# Altium PCB 前端三极管驱动.PcbDoc
Units mil, origin at the board's own origin, x right, y up, seen from the top; angles counter-clockwise.
Board outline 3937.01 x 3937.01 mil, 2 copper layers (Top Layer, Bottom Layer); 149 components, 119 nets, 458 pads, 84 vias.
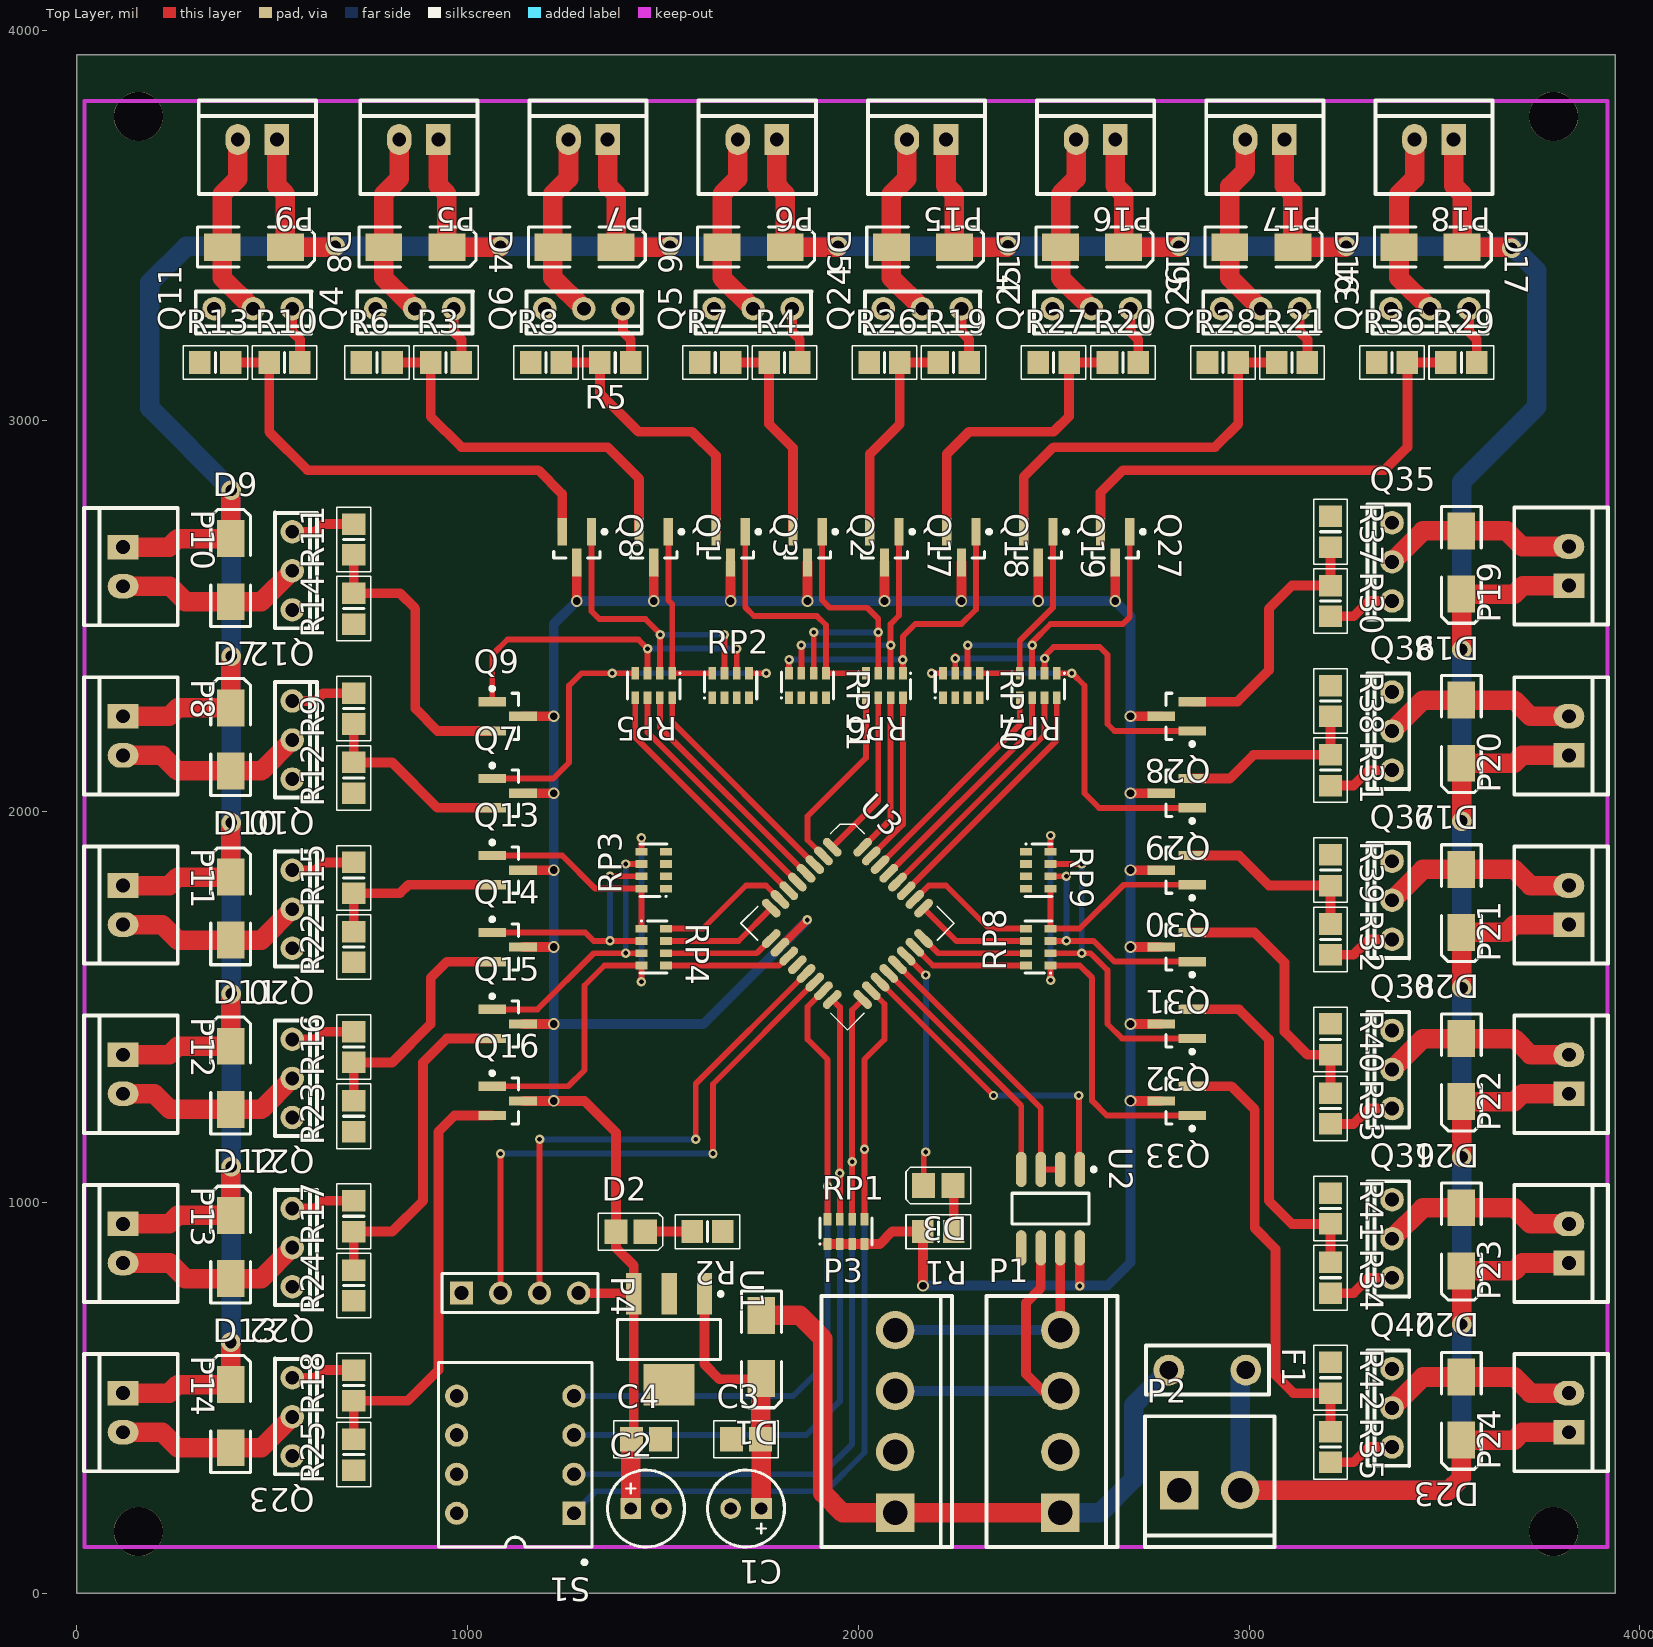
[diagram p0: Top Layer view]
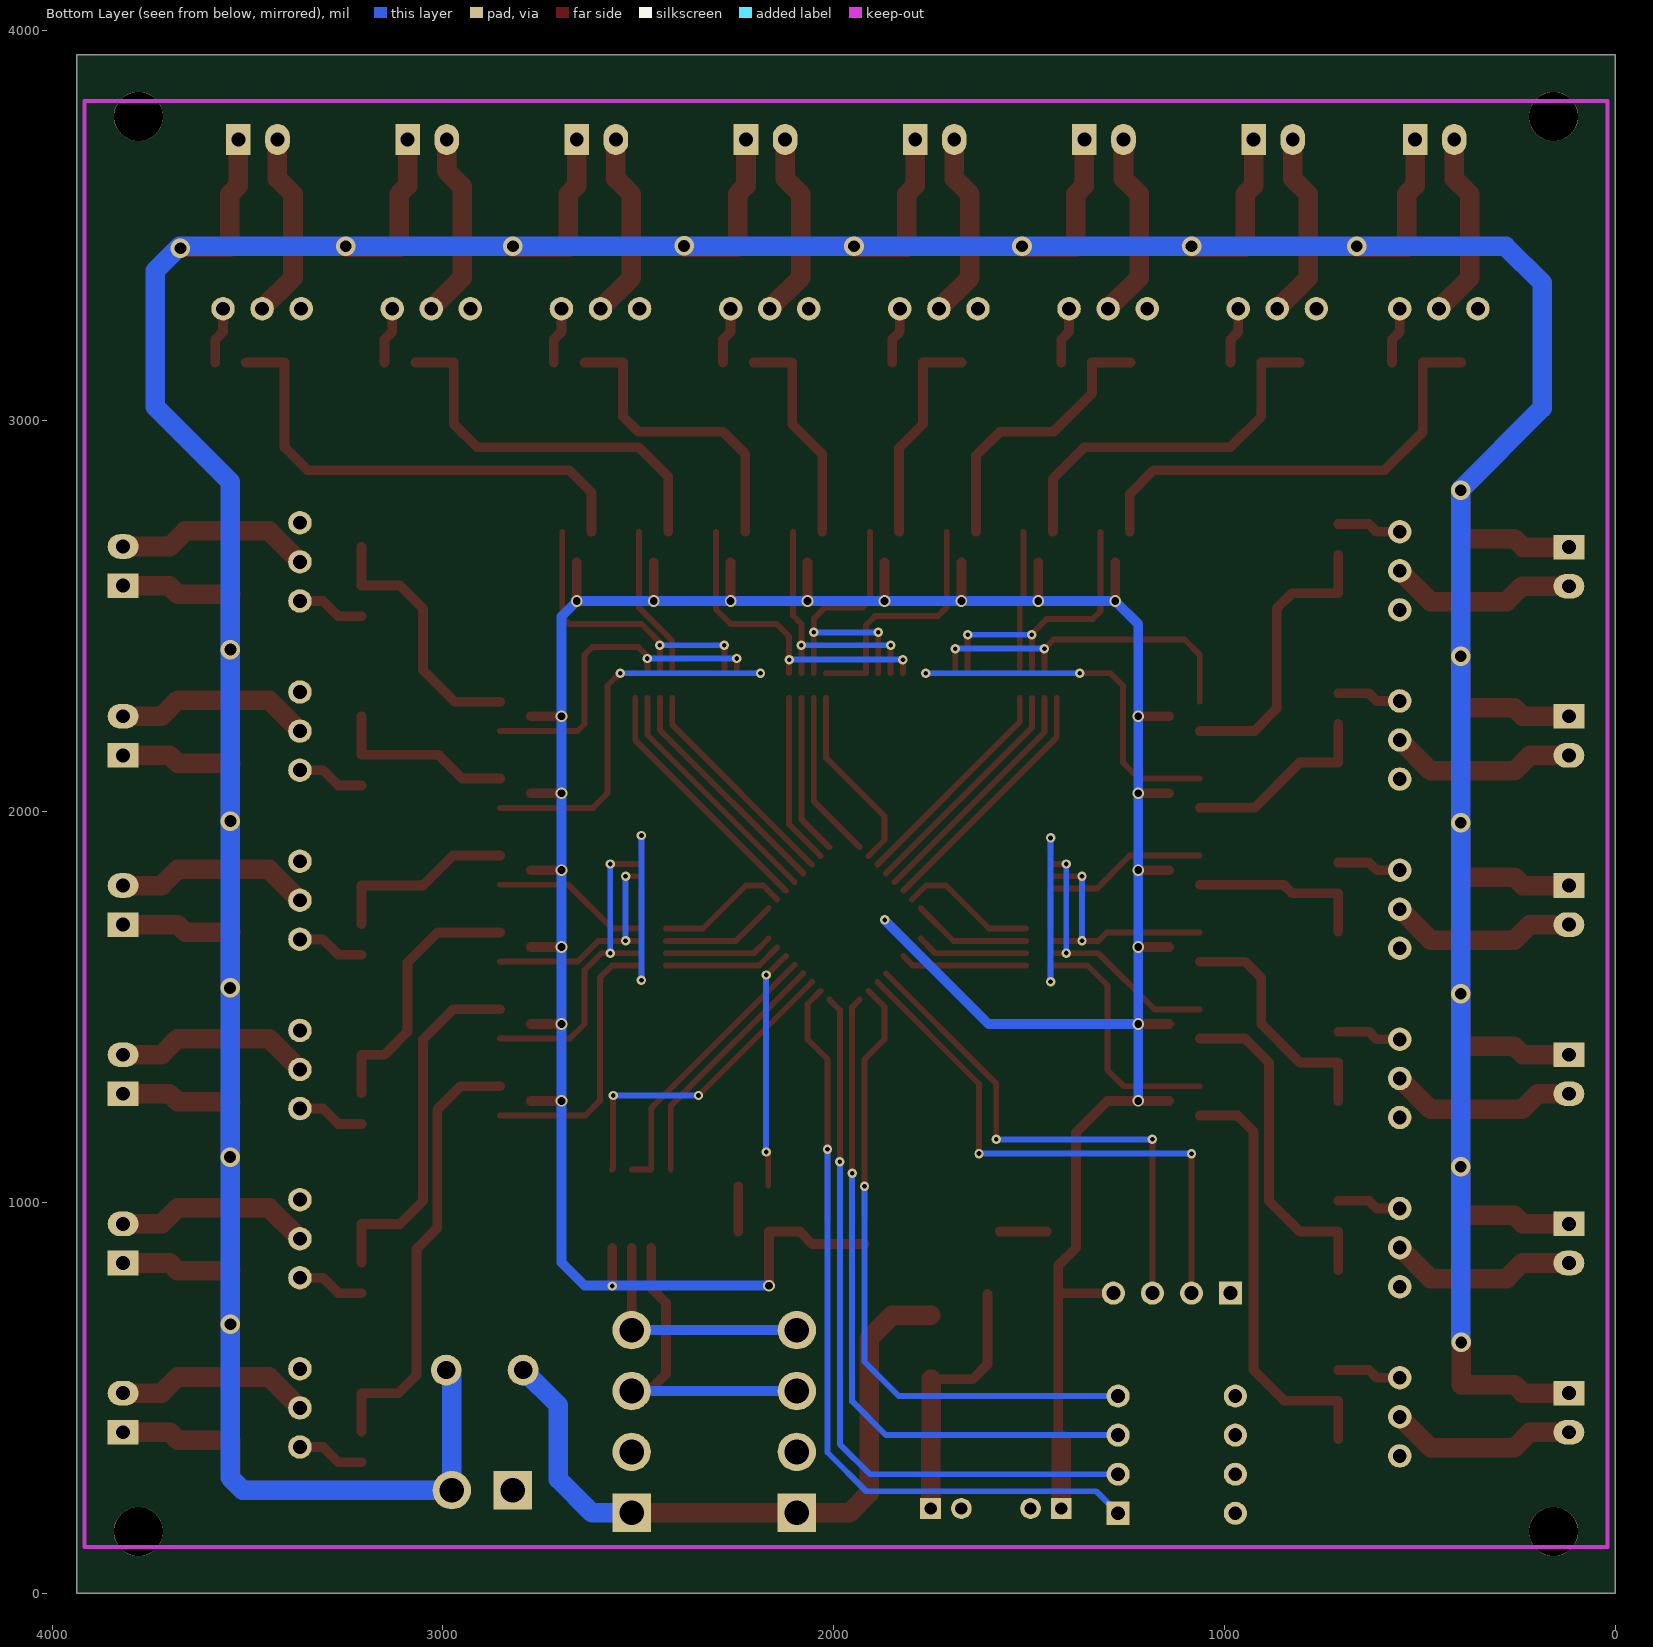
[diagram p1: Bottom Layer view, seen from below]

## Layer stack, top to bottom
Top Solder: solder mask 0.4, Solder Resist, Dk 3.5
Top Layer: signal copper 1.4
Dielectric 1: dielectric 12.6, FR-4, Dk 4.8
Bottom Layer: signal copper 1.4
Bottom Solder: solder mask 0.4, Solder Resist, Dk 3.5

## Board outline
0,0 3937.01,0 3937.01,3937.01 0,3937.01

## Design rules (kind name [scope] priority, off if disabled: settings)
Clearance [All] p1: gap=10
PolygonConnect [All] p1: connectstyle=Relief reliefconductorwidth=10 reliefentries=4 polygonreliefangle="90 Angle" airgapwidth=10
RoutingVias [All] p1: holewidth=28 width=50 viastyle="Through Hole" minholewidth=28 minwidth=50 maxholewidth=28 maxwidth=50
SolderMaskExpansion [All] p1: expansion=4
Width [All] p1: maxlimit=50 minlimit=10 preferedwidth=10
29 further rules are at their usual default settings.

## Components (designator, comment, footprint, x,y, rotation, side; value= is the part's Value field where it differs from the comment)
C1 "Cap Pol2" CAPPR2-5x11.5 1712.6,216.54 r180 top
C2 "Cap Pol2" CAPPR2-5x11.5 1456.69,216.54 r0 top
C3 "0.1uF" CAPC2012M 1712.6,393.7 r0 top
C4 "0.1uF" CAPC2012M 1456.69,393.7 r0 top
D1 "1N4007" DSO-C2/X1.8 1751.97,629.92 r270 top
D2 "LED" LED2012M 1417.32,925.2 r0 top
D3 "LED" LED2012M 2204.72,1043.31 r180 top
D4 "1N4007" DSO-C2/X1.8 866.14,3444.88 r0 top
D5 "1N4007" DSO-C2/X1.8 1732.28,3444.88 r0 top
D6 "1N4007" DSO-C2/X1.8 1299.21,3444.88 r0 top
D7 "1N4007" DSO-C2/X1.8 393.7,2185.04 r90 top
D8 "1N4007" DSO-C2/X1.8 452.76,3444.88 r0 top
D9 "1N4007" DSO-C2/X1.8 393.7,2618.11 r90 top
D10 "1N4007" DSO-C2/X1.8 393.7,1751.97 r90 top
D11 "1N4007" DSO-C2/X1.8 393.7,1318.9 r90 top
D12 "1N4007" DSO-C2/X1.8 393.7,885.83 r90 top
D13 "1N4007" DSO-C2/X1.8 393.7,452.76 r90 top
D14 "1N4007" DSO-C2/X1.8 2165.35,3444.88 r0 top
D15 "1N4007" DSO-C2/X1.8 2598.43,3444.88 r0 top
D16 "1N4007" DSO-C2/X1.8 3031.5,3444.88 r0 top
D17 "1N4007" DSO-C2/X1.8 3464.57,3444.88 r0 top
D18 "1N4007" DSO-C2/X1.8 3543.31,2637.8 r270 top
D19 "1N4007" DSO-C2/X1.8 3543.31,2204.72 r270 top
D20 "1N4007" DSO-C2/X1.8 3543.31,1771.65 r270 top
D21 "1N4007" DSO-C2/X1.8 3543.31,1338.58 r270 top
D22 "1N4007" DSO-C2/X1.8 3543.31,905.51 r270 top
D23 "1N4007" DSO-C2/X1.8 3543.31,472.44 r270 top
F1 "Fuse" SR075 2795,571 r0 top
P1 "Header 4" VH396-4 2663,118 r90 top
P2 "Header 2" VH396-2 2734,118 r0 top
P3 "Header 4" VH396-4 2240,118 r90 top
P4 "Header 4" HDR1X4 984.25,767.72 r0 top
P5 "Header 2" XH254-2 925.2,3720.47 r180 top
P6 "Header 2" XH254-2 1791.34,3720.47 r180 top
P7 "Header 2" XH254-2 1358.27,3720.47 r180 top
P8 "Header 2" XH254-2 118.11,2244.09 r270 top
P9 "Header 2" XH254-2 511.81,3720.47 r180 top
P10 "Header 2" XH254-2 118.11,2677.17 r270 top
P11 "Header 2" XH254-2 118.11,1811.02 r270 top
P12 "Header 2" XH254-2 118.11,1377.95 r270 top
P13 "Header 2" XH254-2 118.11,944.88 r270 top
P14 "Header 2" XH254-2 118.11,511.81 r270 top
P15 "Header 2" XH254-2 2224.41,3720.47 r180 top
P16 "Header 2" XH254-2 2657.48,3720.47 r180 top
P17 "Header 2" XH254-2 3090.55,3720.47 r180 top
P18 "Header 2" XH254-2 3523.62,3720.47 r180 top
P19 "Header 2" XH254-2 3818.9,2578.74 r90 top
P20 "Header 2" XH254-2 3818.9,2144.09 r90 top
P21 "Header 2" XH254-2 3818.9,1711.02 r90 top
P22 "Header 2" XH254-2 3818.9,1277.95 r90 top
P23 "Header 2" XH254-2 3818.9,844.88 r90 top
P24 "Header 2" XH254-2 3818.9,411.81 r90 top
Q1 "NPN" SOT23-3M 1476.38,2677.17 r270 top
Q2 "NPN" SOT23-3M 1870.08,2677.17 r270 top
Q3 "NPN" SOT23-3M 1673.23,2677.17 r270 top
Q4 "NPN" SOT_32 964.57,3287.4 r180 top
Q5 "NPN" SOT_32 1830.71,3287.4 r180 top
Q6 "NPN" SOT_32 1397.64,3287.4 r180 top
Q7 "NPN" SOT23-3M 1102.36,2047.24 r0 top
Q8 "NPN" SOT23-3M 1279.53,2677.17 r270 top
Q9 "NPN" SOT23-3M 1102.36,2244.09 r0 top
Q10 "NPN" SOT_32 551.18,2283.46 r270 top
Q11 "NPN" SOT_32 551.18,3287.4 r180 top
Q12 "NPN" SOT_32 551.18,2716.54 r270 top
Q13 "NPN" SOT23-3M 1102.36,1850.39 r0 top
Q14 "NPN" SOT23-3M 1102.36,1653.54 r0 top
Q15 "NPN" SOT23-3M 1102.36,1456.69 r0 top
Q16 "NPN" SOT23-3M 1102.36,1259.84 r0 top
Q17 "NPN" SOT23-3M 2066.93,2677.17 r270 top
Q18 "NPN" SOT23-3M 2263.78,2677.17 r270 top
Q19 "NPN" SOT23-3M 2460.63,2677.17 r270 top
Q20 "NPN" SOT_32 551.18,1850.39 r270 top
Q21 "NPN" SOT_32 551.18,1417.32 r270 top
Q22 "NPN" SOT_32 551.18,984.25 r270 top
Q23 "NPN" SOT_32 551.18,551.18 r270 top
Q24 "NPN" SOT_32 2263.78,3287.4 r180 top
Q25 "NPN" SOT_32 2696.85,3287.4 r180 top
Q26 "NPN" SOT_32 3129.92,3287.4 r180 top
Q27 "NPN" SOT23-3M 2657.48,2677.17 r270 top
Q28 "NPN" SOT23-3M 2814.96,2244.09 r180 top
Q29 "NPN" SOT23-3M 2814.96,2047.24 r180 top
Q30 "NPN" SOT23-3M 2814.96,1850.39 r180 top
Q31 "NPN" SOT23-3M 2814.96,1653.54 r180 top
Q32 "NPN" SOT23-3M 2814.96,1456.69 r180 top
Q33 "NPN" SOT23-3M 2814.96,1259.84 r180 top
Q34 "NPN" SOT_32 3562.99,3287.4 r180 top
Q35 "NPN" SOT_32 3366.14,2539.37 r90 top
Q36 "NPN" SOT_32 3366.14,2106.3 r90 top
Q37 "NPN" SOT_32 3366.14,1673.23 r90 top
Q38 "NPN" SOT_32 3366.14,1240.16 r90 top
Q39 "NPN" SOT_32 3366.14,807.09 r90 top
Q40 "NPN" SOT_32 3366.14,374.02 r90 top
R1 "1K" RESC2012M 2204.72,925.2 r180 top
R2 "1K" RESC2012M 1614.17,925.2 r180 top
R3 "1K" RESC2012M 944.88,3149.61 r0 top
R4 "1K" RESC2012M 1811.02,3149.61 r0 top
R5 "1K" RESC2012M 1377.95,3149.61 r0 top
R6 "10K" RESC2012M 767.72,3149.61 r0 top
R7 "10K" RESC2012M 1633.86,3149.61 r0 top
R8 "10K" RESC2012M 1200.79,3149.61 r0 top
R9 "1K" RESC2012M 708.66,2263.78 r90 top
R10 "1K" RESC2012M 531.5,3149.61 r0 top
R11 "1K" RESC2012M 708.66,2696.85 r90 top
R12 "10K" RESC2012M 708.66,2086.61 r90 top
R13 "10K" RESC2012M 354.33,3149.61 r0 top
R14 "10K" RESC2012M 708.66,2519.68 r90 top
R15 "1K" RESC2012M 708.66,1830.71 r90 top
R16 "1K" RESC2012M 708.66,1397.64 r90 top
R17 "1K" RESC2012M 708.66,964.57 r90 top
R18 "1K" RESC2012M 708.66,531.5 r90 top
R19 "1K" RESC2012M 2244.09,3149.61 r0 top
R20 "1K" RESC2012M 2677.17,3149.61 r0 top
R21 "1K" RESC2012M 3110.24,3149.61 r0 top
R22 "10K" RESC2012M 708.66,1653.54 r90 top
R23 "10K" RESC2012M 708.66,1220.47 r90 top
R24 "10K" RESC2012M 708.66,787.4 r90 top
R25 "10K" RESC2012M 708.66,354.33 r90 top
R26 "10K" RESC2012M 2066.93,3149.61 r0 top
R27 "10K" RESC2012M 2500,3149.61 r0 top
R28 "10K" RESC2012M 2933.07,3149.61 r0 top
R29 "1K" RESC2012M 3543.31,3149.61 r0 top
R30 "1K" RESC2012M 3208.66,2539.37 r270 top
R31 "1K" RESC2012M 3208.66,2106.3 r270 top
R32 "1K" RESC2012M 3208.66,1673.23 r270 top
R33 "1K" RESC2012M 3208.66,1240.16 r270 top
R34 "1K" RESC2012M 3208.66,807.09 r270 top
R35 "1K" RESC2012M 3208.66,374.02 r270 top
R36 "10K" RESC2012M 3366.14,3149.61 r0 top
R37 "10K" RESC2012M 3208.66,2716.54 r270 top
R38 "10K" RESC2012M 3208.66,2283.46 r270 top
R39 "10K" RESC2012M 3208.66,1850.39 r270 top
R40 "10K" RESC2012M 3208.66,1417.32 r270 top
R41 "10K" RESC2012M 3208.66,984.25 r270 top
R42 "10K" RESC2012M 3208.66,551.18 r270 top
RP1 "10K" EXB38V 1968.5,925.2 r0 top
RP2 "10K" EXB38V 1673.23,2322.83 r0 top
RP3 "10K" EXB38V 1476.38,1850.39 r90 top
RP4 "470" EXB38V 1476.38,1653.54 r270 top
RP5 "470" EXB38V 1476.38,2322.83 r180 top
RP6 "470" EXB38V 2066.93,2322.83 r180 top
RP7 "470" EXB38V 2460.63,2322.83 r180 top
RP8 "470" EXB38V 2460.63,1653.54 r90 top
RP9 "10K" EXB38V 2460.63,1850.39 r270 top
RP10 "10K" EXB38V 2263.78,2322.83 r0 top
RP11 "10K" EXB38V 1870.08,2322.83 r0 top
S1 "SW DIP-4" SWITCH-8 1122.05,354.33 r180 top
U1 "LM7805" SOT223-4M 1515.75,649.61 r270 top
U2 "MAX485ESA" SO8_M 2492,984 r270 top
U3 "STC15W408S_LQFP32" LQFP32 1968.5,1732.28 r315 top

## Footprints (in the part's own frame and the unit in brackets; to place one, negate y for a bottom-side part, rotate by r counter-clockwise, add the part's x,y. Pads: shape width x height; smd on the part's side, far side on the other; paste and mask are expansions set on the pad)
CAPC2012M [mm] "Chip Capacitor, Body 2.0x1.3mm, IPC Low Density"
  rect 1.5x1.6 smd: 1(-0.95,0) 2(0.95,0)
  silkscreen extent -2.1,-1.2 2.1,1.2, body extent -1.1,-0.72 1.1,0.72, height 1.1
CAPPR2-5x11.5 [mm] "Capacitor, Electrolytic, Radial; Body 5 x 11.5 mm (Dia.xH typ); Pin Spacing 2 mm (typ)"
  rect 1.35x1.35 hole 0.8: 1(-1,0)
  round 1.35 hole 0.8: 2(1,0)
  silkscreen extent -2.5,-2.5 2.5,2.5
DSO-C2/X1.8 [mm] "DO-214-AC/SMA; 2 C-Bend Leads; Body 5 x 2.7 mm, inc. leads (LxW)"
  rect 2.4x1.8 smd: 1(-2.05,0) 2(2.05,0)
  silkscreen extent -3.65,-1.3 3.95,1.3
EXB38V [mm] "Chip Resistor Array, (0603x4); SM; 8 Leads; Body 3.40 x 1.75 mm (LxW max)"
  rect 0.5x0.8 smd: 1(-1.2,-0.8) 2(-0.4,-0.8) 3(0.4,-0.8) 4(1.2,-0.8) 5(1.2,0.8) 6(0.4,0.8) 7(-0.4,0.8) 8(-1.2,0.8)
  silkscreen extent -1.75,-0.87 1.7,0.87
HDR1X4 [mm] "Connector; Header; 4 Position"
  rect 1.5x1.5 hole 0.9: 1(0,0)
  round 1.5 hole 0.9: 2(2.54,0) 3(5.08,0) 4(7.62,0)
  silkscreen extent -1.27,-1.27 8.89,1.27
LED2012M [mm] "Chip LED, Body 2.0x1.3mm, IPC Low Density"
  rect 1.5x1.6 smd: 1(-0.95,0) 2(0.95,0)
  silkscreen extent -2.1,-1.2 2.1,1.2, body extent -1.1,-0.72 1.1,0.72, height 1.1
LQFP32 [mm]
  oval 1.5x0.55 smd: 1(-3.81,2.54) 2(-3.81,1.74) 3(-3.81,0.94) 4(-3.81,0.14) 5(-3.81,-0.66) 6(-3.81,-1.46) 7(-3.81,-2.26) 8(-3.81,-3.06) 17(4.59,-3.06) 18(4.59,-2.26) 19(4.59,-1.46) 20(4.59,-0.66) 21(4.59,0.14) 22(4.59,0.94) 23(4.59,1.74) 24(4.59,2.54)
  oval 0.55x1.5 smd: 9(-2.41,-4.46) 10(-1.61,-4.46) 11(-0.81,-4.46) 12(-0.01,-4.46) 13(0.79,-4.46) 14(1.59,-4.46) 15(2.39,-4.46) 16(3.19,-4.46) 25(3.19,3.94) 26(2.39,3.94) 27(1.59,3.94) 28(0.79,3.94) 29(-0.01,3.94) 30(-0.81,3.94) 31(-1.61,3.94) 32(-2.41,3.94)
  silkscreen extent -4.51,-5.16 5.29,4.64
RESC2012M [mm] "Chip Resistor, Body 2.0x1.3mm, IPC Low Density"
  rect 1.4x1.5 smd: 1(-1,0) 2(1,0)
  silkscreen extent -2.1,-1.1 2.1,1.1, body extent -1.07,-0.7 1.07,0.7, height 0.65
SO8_M [mm] "SOIC, 8-Leads, Body 4.9x3.9mm, Pitch 1.27mm, IPC Low Density"
  oval 2.3x0.7 smd: 1(-2.55,1.905) 2(-2.55,0.635) 3(-2.55,-0.635) 4(-2.55,-1.905) 5(2.55,-1.905) 6(2.55,-0.635) 7(2.55,0.635) 8(2.55,1.905)
  silkscreen extent -2.67,-2.5 1,2.93, body extent -2,-2.5 2,2.5, height 1.75
SOT23-3M [mm] "SOT23, 3-Leads, Body 2.9x1.3mm, Pitch 0.95mm, Lead Span 2.5mm, IPC Low Density"
  rect 1.8x0.6 smd: 1(-1,0.95) 2(-1,-0.95) 3(1,0)
  silkscreen extent -1.12,-1.5 0.7,1.93, body extent -0.7,-1.5 0.7,1.5, height 1.1
SOT223-4M [mm] "SOT223/SC73, 4-Leads, Body 6.5x3.5mm, Pitch 2.3mm, Lead Span 7mm, IPC Low Density"
  rect 2.7x1 smd: 1(-2.95,2.3) 2(-2.95,0) 3(-2.95,-2.3)
  rect 2.7x3.3 smd: 4(2.95,0)
  silkscreen extent -3.07,-3.35 1.3,3.48, body extent -1.85,-3.35 1.85,3.35, height 1.8
SOT_32 [mil]
  round 60 hole 35.43: 1(0,0) 2(200,0) 3(100,0)
  silkscreen extent -49,-44 247,63
SR075 [mm]
  round 2 hole 1.2: 1(0,0) 2(5,0)
  silkscreen extent -1.5,-1.6 6.5,1.6
SWITCH-8 [mm] "DIP; 8 Leads; Row Spacing 7.62 mm; Pitch 2.54 mm"
  rect 1.5x1.5 hole 0.9: 1(-3.81,3.81)
  round 1.5 hole 0.9: 2(-3.81,1.27) 3(-3.81,-1.27) 4(-3.81,-3.81) 5(3.81,-3.81) 6(3.81,-1.27) 7(3.81,1.27) 8(3.81,3.81)
  silkscreen extent -5,-6 5,7.12, body extent -5,-6 5,6, height 6.2
VH396-2 [mm]
  rect 2.5x2.5 hole 1.6: 1(2.22,3.7)
  round 2.5 hole 1.6: 2(6.18,3.7)
  silkscreen extent 0,0 8.4,8.5
VH396-4 [mm]
  rect 2.5x2.5 hole 1.6: 1(2.22,3.7)
  round 2.5 hole 1.6: 2(6.18,3.7) 3(10.14,3.7) 4(14.1,3.7)
  silkscreen extent 0,0 16.32,8.5
XH254-2 [mm]
  rect 1.6x2 hole 0.9: 1(0,0)
  oval 1.6x2 hole 0.9: 2(2.54,0)
  silkscreen extent -2.54,-2.54 5.08,3.56

## Part data
C1 C2: "Polarized Capacitor (22uf-47uf)"
C3 C4: library part Cap, "Capacitor"
D1 D4 D5 D6 D7 D8 D9 D10 D11 D12 D13 D14 D15 D16 D17 D18 D19 D20 D21 D22 D23: library part Diode, "Default Diode"
D2 D3: "Typical INFRARED GaAs LED"
P1 P3 P4: "Header, 4-Pin"
P2 P5 P6 P7 P8 P9 P10 P11 P12 P13 P14 P15 P16 P17 P18 P19 P20 P21 P22 P23 P24: "Header, 2-Pin"
Q1 Q2 Q3 Q4 Q5 Q6 Q7 Q8 Q9 Q10 Q11 Q12 Q13 Q14 Q15 Q16 Q17 Q18 Q19 Q20 Q21 Q22 Q23 Q24 Q25 Q26 Q27 Q28 Q29 Q30 Q31 Q32 Q33 Q34 Q35 Q36 Q37 Q38 Q39 Q40: "NPN Bipolar Transistor"
R1 R2 R3 R4 R5 R6 R7 R8 R9 R10 R11 R12 R13 R14 R15 R16 R17 R18 R19 R20 R21 R22 R23 R24 R25 R26 R27 R28 R29 R30 R31 R32 R33 R34 R35 R36 R37 R38 R39 R40 R41 R42: library part Res, "Resistor"
RP1 RP2 RP3 RP4 RP5 RP6 RP7 RP8 RP9 RP10 RP11: library part "Res Pack"
S1: "DIP Switch, 4 Position, SPST"
U2: "Low-Power, Slew-Rate-Limited RS-485/RS-422 Transceiver"

## Free pads (board coordinates)
  round 125.98 hole 125.98: 0(157.48,157.48) 0(157.48,3779.53) 0(3779.53,157.48) 0(3779.53,3779.53)

## Via types
v1: diameter 24, hole 12, Top Layer to Bottom Layer, 44 vias
v2: diameter 30, hole 20, Top Layer to Bottom Layer, 21 vias
v3: diameter 50, hole 30, Top Layer to Bottom Layer, 19 vias

## Nets (pads, with @x,y where several pads share a name; then routed paths per layer and width w, separated by ;. In a path a pad name is that pad's centre, name@x,y a point inside that pad or via, vN(x,y) a via of type N, cw(c..) or ccw(c..) an arc to the next point about the centre after c; other vN are vias at no path point)
24V: D1.1 F1.1 P1.1 P3.1 | length 1880.7
  Top Layer w50: D1.1 1850.37,710.63 1909.45,651.55 1909.45,255.91 1959.84,205.51 ; P3.1@2094.33,205.51 1959.84,205.51 ; P1.1 P3.1 1959.95,205.4 1959.84,205.51
  Bottom Layer w50: P1.1 2618.4,205.4 2705,292 2705,481 F1.1
24V_OUT: D4.2 D5.2 D6.2 D7.2 D8.2 D9.2 D10.2 D11.2 D12.2 D13.2 D14.2 D15.2 D16.2 D17.2 D18.2 D19.2 D20.2 D21.2 D22.2 D23.2 F1.2 P2.2 P5.1 P6.1 P7.1 P8.1 P9.1 P10.1 P11.1 P12.1 P13.1 P14.1 P15.1 P16.1 P17.1 P18.1 P19.1 P20.1 P21.1 P22.1 P23.1 P24.1 | length 19360.4
  Top Layer w50: P14.1 236.22,511.81 257.87,533.46 D13.2 v3(393.7,641.7) ; P13.1 236.22,944.88 257.87,966.54 D12.2 v3@393.7,1089.7 ; P12.1 236.22,1377.95 257.87,1399.61 D11.2 v3@393.7,1532.7 ; P11.1 236.22,1811.02 257.87,1832.68 D10.2 v3@393.7,1970.7 ; P8.1 236.22,2244.09 257.87,2265.75 D7.2 v3@393.7,2396.7 ; P10.1 236.22,2677.17 257.87,2698.82 D9.2 v3@393.7,2821.7 ; P9.1 511.81,3602.36 533.46,3580.71 D8.2 v3@658.88,3444.88 ; P5.1 925.2,3602.36 946.85,3580.71 D4.2 v3@1081.88,3444.88 ; P7.1 1358.27,3602.36 1379.92,3580.71 D6.2 v3@1515.88,3444.88 ; P6.1 1791.34,3602.36 1812.99,3580.71 D5.2 v3@1945.88,3444.88 ; P15.1 2224.41,3602.36 2246.06,3580.71 D14.2 v3@2379.88,3444.88 ; P16.1 2657.48,3602.36 2679.13,3580.71 D15.2 v3@2818.88,3444.88 ; P2.2 3511.7,263.67 3543.31,295.28 D23.2 3679.13,391.73 3699.21,411.81 P24.1 ; P17.1 3090.55,3602.36 3112.2,3580.71 D16.2 v3@3246.88,3444.88 ; P18.1 3523.62,3602.36 3545.28,3580.71 D17.2 v3@3669.12,3444.88 ; D22.2 3679.13,824.8 3699.21,844.88 P23.1 ; D21.2 3679.13,1257.87 3699.21,1277.95 P22.1 ; D20.2 3659.45,1690.94 3679.53,1711.02 P21.1 ; D19.2 3679.13,2124.02 3699.21,2144.09 P20.1 ; D18.2 3679.13,2557.09 3700.79,2578.74 P19.1 ; v3(3544,688) D22.2@3544,824.11 ; v3(3544,1976) D19.2@3544,2123.32 ; v3(3544,2415) D18.2@3544,2556.39 ; v3(3545,1116) D21.2@3545,1256.18 ; v3(3545,1549) D20.2@3545,1689.25
  Bottom Layer w50: v3@395,642 v3(395,1091) v3(395,1534) v3(395,1972) v3(395,2398) v3(395,2823) 395,2825 187,3033 187,3354 280,3447 v3(661,3447) v3(1084,3447) v3(1518,3447) v3(1948,3447) v3(2821,3447) v3(3249,3447) 3674,3447 3736,3385 3736,3036 3545,2845 v3(3545,1549) v3(3545,1116) 3545,296 3512.67,263.67 P2.2 2977.31,556.46 F1.2
  other v3: 3672,3442 2383,3448
A: P1.3 P3.3 U2.6 | length 823
  Top Layer w25: U2.6 2467,781 2429,743 2429,560.76 P1.3@2472.44,517.32
  Bottom Layer w25: P3.3 P1.3
ADDR1: RP1.5 S1.1 U3.18 | length 2204.3
  Top Layer w15: RP1.5 v1(2015.75,1136) 2015.75,1366.14 2066.93,1417.32 2066.93,1508.03 U3.18
  Bottom Layer w15: S1.1 1328.33,260.61 1916.61,260.61 2015.75,359.75 v1(2015.75,1136)
ADDR2: RP1.6 S1.2 U3.17 | length 2040.6
  Top Layer w15: RP1.6 v1(1984.25,1104) 1984.25,1492.47 U3.17
  Bottom Layer w15: S1.2 1907.33,304.33 1984.25,381.25 v1(1984.25,1104)
ADDR3: RP1.7 S1.3 U3.16 | length 1871.5
  Top Layer w15: U3.16 1952.76,1499.71 v1(1952.76,1075) RP1.7
  Bottom Layer w15: S1.3 1866.33,404.33 1952.76,490.76 v1(1952.76,1075)
ADDR4: RP1.8 S1.4 U3.15 | length 1757.3
  Top Layer w15: U3.15 1870.08,1500.79 1870.08,1417.32 1921.26,1366.14 RP1.8
  Bottom Layer w15: S1.4 1833.33,504.33 1921,592 v1(1921,1041)
B: P1.4 P3.4 U2.7 | length 668.9
  Top Layer w25: U2.7 2517,673.45 P1.4
  Bottom Layer w25: P3.4@2059.06,673.23 P3.4@2094.33,673.23 ; P3.4 P1.4
GND: C1.2 C2.2 C3.1 C4.2 P1.2 P2.1 P3.2 P4.1 Q4.2 Q5.2 Q6.2 Q10.2 Q11.2 Q12.2 Q20.2 Q21.2 Q22.2 Q23.2 Q24.2 Q25.2 Q26.2 Q34.2 Q35.2 Q36.2 Q37.2 Q38.2 Q39.2 Q40.2 R2.1 R6.1 R7.1 R8.1 R12.1 R13.1 R14.1 R22.1 R23.1 R24.1 R25.1 R26.1 R27.1 R28.1 R36.1 R37.1 R38.1 R39.1 R40.1 R41.1 R42.1 RP2.1 RP2.2 RP2.3 RP2.4 RP3.1 RP3.2 RP3.3 RP3.4 RP9.1 RP9.2 RP9.3 RP9.4 RP10.1 RP10.2 RP10.3 RP10.4 RP11.1 RP11.2 RP11.3 RP11.4 S1.5 S1.6 S1.7 S1.8 U1.2 U1.4 U2.5 U3.12
LC1: RP6.6 U3.1 | length 431.2
  Top Layer w15: U3.1 2051.18,2027.09 RP6.6
LC2: RP6.5 U3.2 | length 483.4
  Top Layer w15: U3.2 1870.08,1927.59 1870.08,1988.19 2019.68,2137.8 RP6.5
LC3: RP5.8 U3.3 | length 578
  Top Layer w15: RP5.8 1523.62,2229.5 U3.3
LC4: RP5.7 U3.4 | length 604.1
  Top Layer w15: RP5.7 1492.13,2216.46 U3.4
LC5: RP5.6 U3.5 | length 630.2
  Top Layer w15: RP5.6 1460.63,2203.41 U3.5
LC6: RP5.5 U3.6 | length 656.3
  Top Layer w15: RP5.5 1429.13,2190.36 U3.6
LC7: RP4.8 U3.7 | length 352.1
  Top Layer w15: RP4.8 1602.36,1700.79 1712.6,1811.02 1763.93,1811.02 U3.7
LC8: RP4.7 U3.8 | length 304.1
  Top Layer w15: RP4.7 1693.38,1669.29 U3.8
LC9: RP4.6 U3.9 | length 284.9
  Top Layer w15: RP4.6 1739.83,1637.8 U3.9
LC10: RP4.5 U3.11 | length 324
  Top Layer w15: RP4.5 1797.42,1606.3 U3.11
LC11: RP6.7 U3.32 | length 411.9
  Top Layer w15: U3.32 2082.68,1980.64 RP6.7
LC12: RP6.8 U3.31 | length 438
  Top Layer w15: U3.31 2114.17,1967.59 RP6.8
LC13: RP7.5 U3.30 | length 575
  Top Layer w15: U3.30 2413.39,2222.26 RP7.5
LC14: RP7.6 U3.29 | length 601.1
  Top Layer w15: U3.29 2444.88,2209.22 RP7.6
LC15: RP7.7 U3.28 | length 627.2
  Top Layer w15: U3.28 2476.38,2196.17 RP7.7
LC16: RP7.8 U3.27 | length 653.3
  Top Layer w15: U3.27 2507.87,2183.13 RP7.8
LC17: RP8.5 U3.26 | length 344.8
  Top Layer w15: U3.26 2180.31,1811.02 2224.41,1811.02 2334.65,1700.79 RP8.5
LC18: RP8.6 U3.25 | length 296.9
  Top Layer w15: U3.25 2250.87,1669.29 RP8.6
LC19: RP8.7 U3.24 | length 277.6
  Top Layer w15: U3.24 2204.41,1637.8 RP8.7
LC20: RP8.8 U3.23 | length 303.7
  Top Layer w15: U3.23 2191.37,1606.3 RP8.8
LC_DRV1: Q2.1 RP6.3 RP11.6 | length 747.7
  Top Layer w15: RP11.6 1885.83,2458.83 v1(1886,2459) ; Q2.1 1907.48,2541.52 1927,2522 2023,2522 2051.18,2493.82 RP6.3
  Bottom Layer w15: v1(1886,2459) v1(2051,2459)
LC_DRV2: Q3.1 RP6.4 RP11.5 | length 644.5
  Top Layer w15: Q3.1 1710.63,2523.37 1733,2501 1894,2501 1917.32,2477.68 RP11.5 RP6.4
LC_DRV3: Q1.1 RP2.8 RP5.1 | length 468.6
  Top Layer w15: Q1.1 1513.78,2541.34 1523.62,2531.5 RP5.1 RP2.8
LC_DRV4: Q8.1 RP2.7 RP5.2 | length 766
  Top Layer w15: Q8.1 1316.93,2513.07 1337,2493 1455,2493 1492.13,2455.87 RP5.2 ; RP2.7 v1@1657.48,2452.48
  Bottom Layer w15: v1(1493,2453) v1(1657,2453)
LC_DRV5: Q9.1 RP2.6 RP5.3 | length 898
  Top Layer w15: Q9.1 1062.99,2401.57 1102.36,2440.94 1437.01,2440.94 v1(1460.63,2417.32) RP5.3 ; RP2.6@1689,2354.35 v1(1689,2417)
  Bottom Layer w15: v1(1460.63,2417.32) 1688.68,2417.32 v1(1689,2417)
LC_DRV6: Q7.1 RP2.5 RP5.4 | length 1031.4
  Top Layer w15: Q7.1 1218.5,2084.65 1259.84,2125.98 1259.84,2322.83 1291.34,2354.33 v1(1370,2354.33) RP5.4 ; RP2.5 v1(1764.33,2354.33)
  Bottom Layer w15: v1(1370,2354.33) v1(1764.33,2354.33)
LC_DRV7: Q13.1 RP3.8 RP4.1 | length 519.3
  Top Layer w15: Q13.1 1242.13,1887.8 1326.77,1803.15 RP3.8 RP4.1
LC_DRV8: Q14.1 RP3.7 RP4.2 | length 636.7
  Top Layer w15: Q14.1 1301.18,1690.94 1322.83,1669.29 RP4.2 ; v1(1364.35,1834.65) RP3.7
  Bottom Layer w15: v1(1364.35,1669.35) v1(1364.35,1834.65)
LC_DRV9: Q15.1 RP3.6 RP4.3 | length 709.4
  Top Layer w15: Q15.1 1179.13,1494.09 1322.83,1637.8 RP4.3 ; v1(1404.86,1866.14) RP3.6
  Bottom Layer w15: v1(1404.86,1638.14) v1(1404.86,1866.14)
LC_DRV10: Q16.1 RP3.5 RP4.4 | length 1080.9
  Top Layer w15: Q16.1 1257.87,1297.24 1299.21,1338.58 1299.21,1555.12 1350.39,1606.3 RP4.4 v1(1444.88,1565.12) ; RP3.5 v1(1444.88,1932.88)
  Bottom Layer w15: v1(1444.88,1565.12) v1(1444.88,1932.88)
LC_DRV11: Q17.1 RP6.2 RP11.7 | length 672
  Top Layer w15: v1(1854,2426) 1854.33,2425.67 RP11.7 ; RP6.2 2082.68,2480.31 2104.33,2501.97 Q17.1
  Bottom Layer w15: v1(1854,2426) v1(2083,2426)
LC_DRV12: Q18.1 RP6.1 RP11.8 | length 834.7
  Top Layer w15: RP11.8 v1(1822.83,2389.17) ; RP6.1 2114.17,2448.82 2145.67,2480.32 2263.78,2480.32 2301.18,2517.72 Q18.1
  Bottom Layer w15: v1(1822.83,2389.17) v1(2113.83,2389.17)
LC_DRV13: Q19.1 RP7.4 RP10.5 | length 499.6
  Top Layer w15: RP10.5 RP7.4 2413.39,2437.39 2498.03,2522.03 Q19.1
LC_DRV14: Q27.1 RP7.3 RP10.6 | length 810.6
  Top Layer w15: RP10.6 v1@2279.53,2425.53 ; RP7.3 2444.88,2433.53 2491.67,2480.32 2677.17,2480.32 2694.88,2498.03 Q27.1
  Bottom Layer w15: v1(2280,2426) v1(2445,2426)
LC_DRV15: Q28.1 RP7.2 RP10.7 | length 896.4
  Top Layer w15: RP10.7 v1@2248.03,2398.03 ; RP7.2 2476.38,2397.64 2500,2421.26 2618.11,2421.26 2637.8,2401.57 2637.8,2224.41 2655.51,2206.69 Q28.1
  Bottom Layer w15: v1(2248,2392) v1(2477,2392)
LC_DRV16: Q29.1 RP7.1 RP10.8 | length 1039.1
  Top Layer w15: v1(2187.33,2354.33) RP10.8 ; RP7.1 2547.24,2354.33 2578.74,2322.83 2578.74,2047.24 2616.14,2009.84 Q29.1
  Bottom Layer w15: v1(2187.33,2354.33) v1(2546.67,2354.33)
LC_DRV17: Q30.1 RP8.4 RP9.5 | length 511
  Top Layer w15: RP9.5 RP8.4 2566.93,1700.79 2679.13,1812.99 Q30.1
LC_DRV18: Q31.1 RP8.3 RP9.6 | length 590
  Top Layer w15: RP8.3 2602.36,1669.29 2655.51,1616.14 Q31.1 ; RP9.6 v1(2532.65,1834.65)
  Bottom Layer w15: v1(2532.65,1669.35) v1(2532.65,1834.65)
LC_DRV19: Q32.1 RP8.2 RP9.7 | length 841.4
  Top Layer w15: RP8.2 2594.49,1637.8 2637.8,1594.49 2637.8,1456.69 2675.2,1419.29 Q32.1 ; RP9.7 v1(2572,1866.14)
  Bottom Layer w15: v1(2572,1638) v1(2572,1866.14)
LC_DRV20: Q33.1 RP8.1 RP9.8 | length 1154.9
  Top Layer w15: v1(2492.13,1568.87) RP8.1 2566.93,1606.3 2598.43,1574.8 2598.43,1259.84 2635.83,1222.44 Q33.1 ; RP9.8 v1(2492.13,1939.13)
  Bottom Layer w15: v1(2492.13,1568.87) v1(2492.13,1939.13)
LED1: D3.2 U3.22 | length 605.5
  Top Layer w15: U3.22 2172.56,1580.56 2173,1581 v1(2173,1582) ; D3.2 v1@2167.32,1123.32
  Bottom Layer w15: v1(2173,1129) v1(2173,1582)
NetC1_1: C1.1 C3.2 D1.2 U1.1 | length 671.2
  Top Layer w25: U1.1 1606.3,585.7 1644.76,547.24 D1.2@1750,547.24
  Top Layer w50: D1.2@1750,547.24 C3.2 1751.97,391.73 C1.1
NetD2_2: D2.2 R2.2 | length 120.1
  Top Layer w25: D2.2 R2.2
NetD3_1: D3.1 R1.1 | length 116.1
  Top Layer w25: R1.1 D3.1@2244.09,1041.34
NetD4_1: D4.1 P5.2 Q4.3 | length 482.3
  Top Layer w50: P5.2 825.2,3620.47 785.43,3580.71 D4.1 785.43,3366.54 Q4.3
NetD5_1: D5.1 P6.2 Q5.3 | length 482.3
  Top Layer w50: P6.2 1691.34,3620.47 1651.57,3580.71 D5.1 1651.57,3366.54 Q5.3
NetD6_1: D6.1 P7.2 Q6.3 | length 482.3
  Top Layer w50: P7.2 1258.27,3620.47 1218.5,3580.71 D6.1 1218.5,3366.54 Q6.3
NetD7_1: D7.1 P8.2 Q10.3 | length 482.3
  Top Layer w50: P8.2 218.11,2144.09 257.87,2104.33 D7.1 472.05,2104.33 Q10.3
NetD8_1: D8.1 P9.2 Q11.3 | length 482.3
  Top Layer w50: P9.2 411.81,3620.47 372.05,3580.71 D8.1 372.05,3366.54 Q11.3
NetD9_1: D9.1 P10.2 Q12.3 | length 482.3
  Top Layer w50: P10.2 237.8,2577.17 277.56,2537.4 D9.1 472.05,2537.4 Q12.3
NetD10_1: D10.1 P11.2 Q20.3 | length 482.3
  Top Layer w50: P11.2 218.11,1711.02 257.87,1671.26 D10.1 472.05,1671.26 Q20.3
NetD11_1: D11.1 P12.2 Q21.3 | length 482.3
  Top Layer w50: P12.2 198.43,1277.95 238.19,1238.19 D11.1 472.05,1238.19 Q21.3
NetD12_1: D12.1 P13.2 Q22.3 | length 482.3
  Top Layer w50: P13.2 237.8,844.88 277.56,805.12 D12.1 472.05,805.12 Q22.3
NetD13_1: D13.1 P14.2 Q23.3 | length 482.3
  Top Layer w50: P14.2 218.11,411.81 257.87,372.05 D13.1 472.05,372.05 Q23.3
NetD14_1: D14.1 P15.2 Q24.3 | length 482.3
  Top Layer w50: P15.2 2124.41,3620.47 2084.65,3580.71 D14.1 2084.65,3366.54 Q24.3
NetD15_1: D15.1 P16.2 Q25.3 | length 482.3
  Top Layer w50: P16.2 2557.48,3620.47 2517.72,3580.71 D15.1 2517.72,3366.54 Q25.3
NetD16_1: D16.1 P17.2 Q26.3 | length 482.3
  Top Layer w50: P17.2 2990.55,3640.16 2950.79,3600.39 D16.1 2950.79,3366.54 Q26.3
NetD17_1: D17.1 P18.2 Q34.3 | length 482.3
  Top Layer w50: P18.2 3423.62,3620.47 3383.86,3580.71 D17.1 3383.86,3366.54 Q34.3
NetD18_1: D18.1 P19.2 Q35.3 | length 502
  Top Layer w50: Q35.3 3445.28,2718.5 D18.1 3659.45,2718.5 3699.21,2678.74 P19.2
NetD19_1: D19.1 P20.2 Q36.3 | length 502.7
  Top Layer w50: Q36.3 3445.28,2285.43 D19.1 3679.13,2285.43 3720.47,2244.09 P20.2
NetD20_1: D20.1 P21.2 Q37.3 | length 502.7
  Top Layer w50: Q37.3 3445.28,1852.36 D20.1 3679.13,1852.36 3720.47,1811.02 P21.2
NetD21_1: D21.1 P22.2 Q38.3 | length 502.7
  Top Layer w50: Q38.3 3445.28,1419.29 D21.1 3679.13,1419.29 3720.47,1377.95 P22.2
NetD22_1: D22.1 P23.2 Q39.3 | length 502.7
  Top Layer w50: Q39.3 3445.28,986.22 D22.1 3679.13,986.22 3720.47,944.88 P23.2
NetD23_1: D23.1 P24.2 Q40.3 | length 502.7
  Top Layer w50: Q40.3 3445.28,553.15 D23.1 3679.13,553.15 3720.47,511.81 P24.2
NetQ1_2: Q1.2 R3.1 R6.2 | length 971.6
  Top Layer w25: R6.2 R3.1 905.51,3011.81 984.25,2933.07 1358.27,2933.07 1438.98,2852.36 Q1.2
NetQ2_2: Q2.2 R4.1 R7.2 | length 556.8
  Top Layer w25: R7.2 R4.1 1771.65,2992.13 1832.68,2931.1 Q2.2
NetQ3_2: Q3.2 R5.1 R8.2 | length 735.3
  Top Layer w25: R8.2 R5.1 1338.58,3070.87 1437.01,2972.44 1574.8,2972.44 1635.83,2911.42 Q3.2
NetQ4_1: Q4.1 R3.2 | length 145.9
  Top Layer w25: Q4.1 964.57,3228.35 984.25,3208.66 R3.2
NetQ5_1: Q5.1 R4.2 | length 145.9
  Top Layer w25: Q5.1 1830.71,3228.35 1850.39,3208.66 R4.2
NetQ6_1: Q6.1 R5.2 | length 145.9
  Top Layer w25: Q6.1 1397.64,3228.35 1417.32,3208.66 R5.2
NetQ7_2: Q7.2 R9.1 R12.2 | length 500.9
  Top Layer w25: R9.1 R12.2 807.09,2125.98 923.23,2009.84 Q7.2
NetQ8_2: Q8.2 R10.1 R13.2 | length 1188.1
  Top Layer w25: R13.2 R10.1 492.13,2972.44 590.55,2874.02 1181.1,2874.02 1242.13,2812.99 Q8.2
NetQ9_2: Q9.2 R11.1 R14.2 | length 748.6
  Top Layer w25: R11.1 R14.2 826.77,2559.06 866.14,2519.69 866.14,2263.78 923.23,2206.69 Q9.2
NetQ10_1: Q10.1 R9.2 | length 165.6
  Top Layer w25: Q10.1 610.24,2283.46 629.92,2303.15 R9.2
NetQ11_1: Q11.1 R10.2 | length 145.9
  Top Layer w25: Q11.1 551.18,3228.35 570.87,3208.66 R10.2
NetQ12_1: Q12.1 R11.2 | length 165.6
  Top Layer w25: Q12.1 610.24,2716.54 629.92,2736.22 R11.2
NetQ13_2: Q13.2 R15.1 R22.2 | length 461.7
  Top Layer w25: R22.2 R15.1 826.77,1791.34 848.43,1812.99 Q13.2
NetQ14_2: Q14.2 R16.1 R23.2 | length 628.8
  Top Layer w25: R23.2 R16.1 807.09,1358.27 905.51,1456.69 905.51,1574.8 946.85,1616.14 Q14.2
NetQ15_2: Q15.2 R17.1 R24.2 | length 865
  Top Layer w25: R24.2 R17.1 807.09,925.2 885.83,1003.94 885.83,1358.27 946.85,1419.29 Q15.2
NetQ16_2: Q16.2 R18.1 R25.2 | length 1112.7
  Top Layer w25: R25.2 R18.1 846.46,492.13 925.2,570.87 925.2,1181.1 966.54,1222.44 Q16.2
NetQ17_2: Q17.2 R19.1 R26.2 | length 563.3
  Top Layer w25: Q17.2 2029.53,2915.35 2106.3,2992.13 R26.2 R19.1
NetQ18_2: Q18.2 R20.1 R27.2 | length 788
  Top Layer w25: Q18.2 2226.38,2915.35 2283.46,2972.44 2500,2972.44 2539.37,3011.81 R27.2 R20.1
NetQ19_2: Q19.2 R21.1 R28.2 | length 1001.1
  Top Layer w25: Q19.2 2423.23,2856.3 2500,2933.07 2913.39,2933.07 2972.44,2992.13 R28.2 R21.1
NetQ20_1: Q20.1 R15.2 | length 165.6
  Top Layer w25: Q20.1 610.24,1850.39 629.92,1870.08 R15.2
NetQ21_1: Q21.1 R16.2 | length 165.6
  Top Layer w25: Q21.1 610.24,1417.32 629.92,1437.01 R16.2
NetQ22_1: Q22.1 R17.2 | length 165.6
  Top Layer w25: Q22.1 610.24,984.25 629.92,1003.94 R17.2
NetQ23_1: Q23.1 R18.2 | length 165.6
  Top Layer w25: Q23.1 610.24,551.18 629.92,570.87 R18.2
NetQ24_1: Q24.1 R19.2 | length 145.9
  Top Layer w25: Q24.1 2263.78,3228.35 2283.46,3208.66 R19.2
NetQ25_1: Q25.1 R20.2 | length 145.9
  Top Layer w25: Q25.1 2696.85,3228.35 2716.54,3208.66 R20.2
NetQ26_1: Q26.1 R21.2 | length 145.9
  Top Layer w25: Q26.1 3129.92,3228.35 3149.61,3208.66 R21.2
NetQ27_2: Q27.2 R29.1 R36.2 | length 1248.9
  Top Layer w25: Q27.2 2620.08,2816.93 2677.17,2874.02 3346.46,2874.02 3405.51,2933.07 R36.2 R29.1
NetQ28_2: Q28.2 R30.1 R37.2 | length 668.1
  Top Layer w25: Q28.2 2970.47,2281.5 3051.18,2362.2 3051.18,2519.69 3110.24,2578.74 R30.1 R37.2
NetQ29_2: Q29.2 R31.1 R38.2 | length 478
  Top Layer w25: Q29.2 2950.79,2084.65 3011.81,2145.67 R31.1 R38.2
NetQ30_2: Q30.2 R32.1 R39.2 | length 484.6
  Top Layer w25: Q30.2 2974.41,1887.8 3051.18,1811.02 R39.2 R32.1
NetQ31_2: Q31.2 R33.1 R40.2 | length 686.2
  Top Layer w25: Q31.2 3013.78,1690.94 3090.55,1614.17 3090.55,1437.01 3149.61,1377.95 R40.2 R33.1
NetQ32_2: Q32.2 R34.1 R41.2 | length 922.4
  Top Layer w25: Q32.2 2974.41,1494.09 3051.18,1417.32 3051.18,1003.94 3110.24,944.88 R41.2 R34.1
NetQ33_2: Q33.2 R35.1 R42.2 | length 1144.8
  Top Layer w25: Q33.2 2954.72,1297.24 3014.63,1237.34 3014.63,934 3068,880.63 3068,558 3114.19,511.81 R42.2 R35.1
NetQ34_1: Q34.1 R29.2 | length 145.9
  Top Layer w25: Q34.1 3562.99,3228.35 3582.68,3208.66 R29.2
NetQ35_1: Q35.1 R30.2 | length 173.8
  Top Layer w25: R30.2 3267.72,2500 3307.09,2539.37 Q35.1
NetQ36_1: Q36.1 R31.2 | length 173.8
  Top Layer w25: R31.2 3267.72,2066.93 3307.09,2106.3 Q36.1
NetQ37_1: Q37.1 R32.2 | length 173.8
  Top Layer w25: R32.2 3267.72,1633.86 3307.09,1673.23 Q37.1
NetQ38_1: Q38.1 R33.2 | length 173.8
  Top Layer w25: R33.2 3267.72,1200.79 3307.09,1240.16 Q38.1
NetQ39_1: Q39.1 R34.2 | length 173.8
  Top Layer w25: R34.2 3267.72,767.72 3307.09,807.09 Q39.1
NetQ40_1: Q40.1 R35.2 | length 173.8
  Top Layer w25: R35.2 3267.72,334.65 3307.09,374.02 Q40.1
RS485: U2.2 U2.3 U3.21 | length 725.9
  Top Layer w15: U3.21 2467,1241.58 U2.3 U2.2
RXD: U2.1 U3.19 | length 819.3
  Top Layer w15: U3.19 v1(2346,1273.5) ; v1(2564.5,1273.5) 2564.5,1086.89 U2.1
  Bottom Layer w15: v1(2346,1273.5) v1(2564.5,1273.5)
RXD2: P4.3 U3.13 | length 1334.6
  Top Layer w15: P4.3 v1(1184.25,1161.25) ; v1@1584,1161 1584,1303.79 U3.13
  Bottom Layer w15: v1(1184.25,1161.25) v1@1583.25,1161.25
  other v1: 1584,1162
TXD: U2.4 U3.20 | length 642.2
  Top Layer w15: U3.20 2417,1247.04 U2.4
TXD2: P4.2 U3.14 | length 1448.5
  Top Layer w15: P4.2 v1(1084.25,1124.75) ; v1(1628,1125) 1628,1303.25 U3.14
  Bottom Layer w15: v1(1084.25,1124.75) 1625.75,1124.75 v1@1628,1127
VCC: C2.1 C4.1 D2.1 P4.4 Q1.3 Q2.3 Q3.3 Q7.3 Q8.3 Q9.3 Q13.3 Q14.3 Q15.3 Q16.3 Q17.3 Q18.3 Q19.3 Q27.3 Q28.3 Q29.3 Q30.3 Q31.3 Q32.3 Q33.3 R1.2 RP1.1 RP1.2 RP1.3 RP1.4 U1.3 U2.8 U3.10 | length 9347.7
  Top Layer w20: U3.10 v1(1869.58,1723)
  Top Layer w25: Q16.3 v2(1220.47,1259.84) 1299.21,1259.84 1379.92,1179.13 D2.1 1379.92,883.86 1425.2,838.58 U1.3 1425.2,399.61 C4.1 C4.1@1417.32,391.73 ; Q15.3 v2(1220.47,1456.69) ; Q14.3 v2(1220.47,1653.54) ; Q13.3 v2(1220.47,1850.39) ; Q7.3 v2(1220.47,2047.24) ; Q9.3 v2(1220.47,2244.09) ; v2(1279.53,2539.37) Q8.3 ; P4.4 U1.3@1423.23,767.72 ; v2(1476.38,2539.37) Q1.3 ; v2(1673.23,2539.37) Q3.3 ; v2(1870.08,2539.37) Q2.3 ; RP1.1 RP1.2 RP1.3 RP1.4 2055.12,893.7 2086.61,925.2 R1.2 v2(2165.35,786.65) ; v2(2066.93,2539.37) Q17.3 ; v2(2263.78,2539.37) Q18.3 ; v2(2460.63,2539.37) Q19.3 ; v1(2567,786) U2.8 ; v2(2657.48,2539.37) Q27.3 ; v2(2696.85,1259.84) Q33.3 ; v2(2696.85,1456.69) Q32.3 ; v2(2696.85,1653.54) Q31.3 ; v2(2696.85,1850.39) Q30.3 ; v2(2696.85,2047.24) Q29.3 ; v2(2696.85,2244.09) Q28.3
  Top Layer w50: C2.1 C4.1@1417.32,391.73
  Bottom Layer w25: v2(1220.47,1259.84) v2(1220.47,1456.69) ; v1(1869.58,1723) 1603.27,1456.69 v2(1220.47,1456.69) ; v2@2165.35,787.4 2637.8,787.4 2696.85,846.46 v2(2696.85,1259.84) v2(2696.85,1456.69) v2(2696.85,1653.54) v2(2696.85,1850.39) v2(2696.85,2047.24) v2(2696.85,2244.09) 2696.85,2500 v2(2657.48,2539.37) v2(1279.53,2539.37) 1220.47,2480.32 v2(1220.47,1456.69)

## Keep-outs
Keep-Out Layer:
  lines w10: 19.68,118.11 3917.32,118.11 3917.32,3818.9 19.68,3818.9 19.68,118.11

## Silkscreen, mask and mechanical layers (free items; w line width, h text height)
Mechanical 1:
  the board outline again, w10